# Altium PCB LKS_Motor_0406.PcbDoc (part 2 of 4)
Units mm, origin at the board's own origin, x right, y up, seen from the top; angles counter-clockwise.
Board outline 117 x 10 mm, 2 copper layers (Top Layer, Bottom Layer); 114 components, 77 nets, 340 pads, 169 vias.
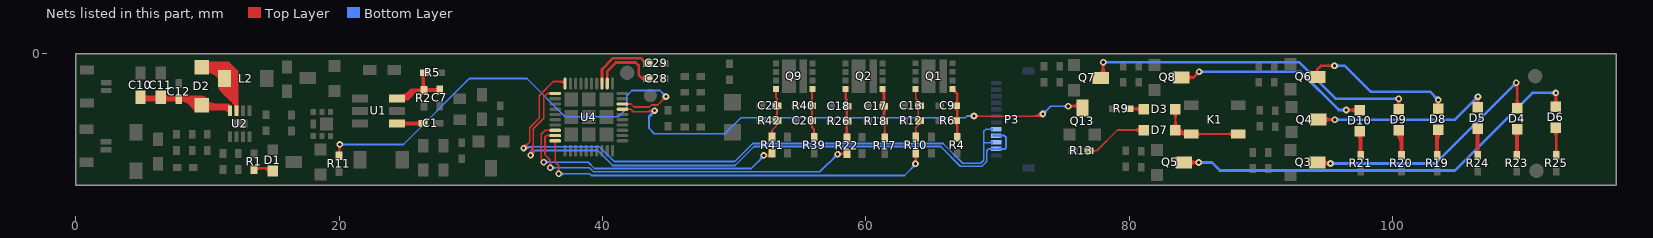
[diagram p2: the nets of this part, all layers, seen from the top]

## Via types
v1: diameter 0.5, hole 0.25, Top Layer to Bottom Layer, 167 vias
v2: diameter 0.7, hole 0.4, Top Layer to Bottom Layer, 2 vias

## Nets (pads, with @x,y where several pads share a name; then routed paths per layer and width w, separated by ;. In a path a pad name is that pad's centre, name@x,y a point inside that pad or via, vN(x,y) a via of type N, cw(c..) or ccw(c..) an arc to the next point about the centre after c; other vN are vias at no path point) (continued)
KEYIN: Q13.3 U4.37 | length 60.5
  Top Layer w0.127: U4.37@41.517,-4.211 42.158,-4.211 42.342,-4.394 43.409,-4.394 ; v1@68.224,-4.75 73.279,-4.75 v1(73.457,-4.572) ; Q13.3@76.454,-4.115 76.327,-3.988 v1(75.387,-3.988) ; 41.983,-4.211 cw(c41.983,-4.074) 41.887,-4.171 ccw(c41.983,-4.074) 41.983,-4.211 ; 41.983,-4.211 ccw(c41.983,-4.347) 41.887,-4.251 cw(c41.983,-4.347) 41.983,-4.211 ; 43.409,-4.394 ccw(c43.409,-3.874) 43.816,-4.197 cw(c43.409,-3.874) 43.409,-4.394 ; 43.409,-4.394 v1@43.856,-4.394 ; 43.409,-4.394 v1@43.856,-4.394 ; v1@43.856,-4.394 43.963,-4.288 v1@43.856,-4.394 ; v1(75.387,-3.988) ccw(c75.387,-2.879) 76.174,-3.66 cw(c75.387,-2.879) v1(75.387,-3.988) ; 75.837,-3.988 cw(c75.837,-3.538) 75.519,-3.856 ccw(c75.837,-3.538) 75.837,-3.988 ; 75.837,-3.988 ccw(c75.837,-4.438) 75.519,-4.12 cw(c75.837,-4.438) 75.837,-3.988 ; 43.672,-4.394 ccw(c43.672,-4.082) 43.916,-4.276 cw(c43.672,-4.082) 43.672,-4.394 ; 43.708,-4.394 cw(c43.708,-4.568) 43.831,-4.445 ccw(c43.708,-4.568) 43.708,-4.394 ; v1@68.356,-4.856 cw(c68.613,-5.113) 68.613,-4.75 ccw(c68.613,-5.113) v1@68.356,-4.856 ; v1@68.356,-4.593 ccw(c68.736,-4.213) 68.736,-4.75 cw(c68.736,-4.213) v1@68.356,-4.593 ; 72.577,-4.75 ccw(c72.577,-3.693) 73.325,-4.44 cw(c72.577,-3.693) 72.577,-4.75 ; 72.884,-4.75 ccw(c72.884,-3.999) 73.415,-4.53 cw(c72.884,-3.999) 72.884,-4.75 ; 73.191,-4.75 ccw(c73.191,-4.306) 73.505,-4.62 cw(c73.191,-4.306) 73.191,-4.75 ; v1@75.626,-3.988 cw(c75.626,-4.765) 76.176,-4.215 ccw(c75.626,-4.765) v1@75.626,-3.988 ; 75.692,-3.988 ccw(c75.692,-3.181) 76.265,-3.749 cw(c75.692,-3.181) 75.692,-3.988 ; 75.933,-3.988 cw(c75.933,-4.458) 76.265,-4.126 ccw(c75.933,-4.458) 75.933,-3.988 ; Q13.3@75.997,-3.988 ccw(c75.997,-3.484) 76.355,-3.839 cw(c75.997,-3.484) Q13.3@75.997,-3.988
  Bottom Layer w0.127: 43.591,-4.796 ccw(c43.144,-4.348) v1@43.776,-4.321 ; 43.601,-4.649 cw(c43.963,-5.011) 43.963,-4.5 ccw(c43.963,-4.681) 43.834,-4.553 ; 43.662,-4.588 ccw(c43.387,-4.313) v1@43.776,-4.313 ; 43.674,-4.713 ccw(c43.356,-4.394) v1@43.806,-4.394 ; 43.796,-4.591 ccw(c43.536,-4.331) v1@43.903,-4.316 ; v1(68.224,-4.724) 67.691,-4.724 67.564,-4.851 50.521,-4.851 49.301,-6.071 43.941,-6.071 43.536,-5.665 43.536,-5.309 ; v1(73.457,-4.572) 74.041,-3.988 v1(75.387,-3.988) ; 43.536,-5.309 43.536,-4.715 43.963,-4.288 43.963,-4.424 43.536,-4.851 43.536,-5.309 ; 67.774,-4.724 cw(c67.774,-5.175) 68.093,-4.856 ccw(c67.774,-5.175) 67.774,-4.724 ; 67.774,-4.724 ccw(c67.774,-4.274) 68.093,-4.593 cw(c67.774,-4.274) 67.774,-4.724 ; 73.775,-4.254 cw(c73.457,-3.935) 73.457,-4.386 ccw(c73.457,-3.935) 73.775,-4.254 ; 73.775,-4.254 ccw(c74.094,-4.572) 73.643,-4.572 cw(c74.094,-4.572) 73.775,-4.254 ; 74.937,-3.988 cw(c74.937,-4.438) 75.255,-4.12 ccw(c74.937,-4.438) 74.937,-3.988 ; 74.937,-3.988 ccw(c74.937,-3.538) 75.255,-3.856 cw(c74.937,-3.538) 74.937,-3.988
  other v1: 43.963,-4.313
KEYOUT: R11.2 U4.38 | length 42.3
  Top Layer w0.127: R11.2@19.99,-7.722 20.041,-7.671 v1(20.041,-6.883) ; U4.38@41.517,-3.811 42.165,-3.811 42.393,-4.039 43.561,-4.039 43.713,-3.886 44.196,-3.886 v1(44.831,-3.251) ; 20.041,-7.334 cw(c20.491,-7.334) 20.172,-7.015 ccw(c20.491,-7.334) 20.041,-7.334 ; 20.041,-7.334 ccw(c19.59,-7.334) 19.909,-7.015 cw(c19.59,-7.334) 20.041,-7.334 ; 20.041,-7.334 ccw(c20.327,-7.334) 20.125,-7.536 cw(c20.327,-7.334) 20.041,-7.334 ; 41.983,-3.811 cw(c41.983,-3.674) 41.887,-3.771 ccw(c41.983,-3.674) 41.983,-3.811 ; 41.983,-3.811 ccw(c41.983,-3.947) 41.887,-3.851 cw(c41.983,-3.947) 41.983,-3.811 ; 44.513,-3.57 cw(c44.831,-3.888) 44.831,-3.438 ccw(c44.831,-3.888) 44.513,-3.57 ; 44.513,-3.57 ccw(c44.194,-3.251) 44.645,-3.251 cw(c44.194,-3.251) 44.513,-3.57 ; R11.2@19.855,-7.536 ccw(c19.407,-7.088) 20.041,-7.088 cw(c19.407,-7.088) R11.2@19.855,-7.536 ; R11.2@19.945,-7.626 ccw(c19.714,-7.395) 20.041,-7.395 cw(c19.714,-7.395) R11.2@19.945,-7.626
  Bottom Layer w0.127: v1(20.041,-6.883) 24.892,-6.883 29.896,-1.88 34.265,-1.88 37.16,-4.775 41.224,-4.775 41.859,-4.14 41.859,-3.175 42.24,-2.794 44.374,-2.794 v1(44.831,-3.251) ; 20.491,-6.883 cw(c20.491,-6.433) 20.172,-6.752 ccw(c20.491,-6.433) 20.491,-6.883 ; 20.491,-6.883 ccw(c20.491,-7.334) 20.172,-7.015 cw(c20.491,-7.334) 20.491,-6.883 ; 44.513,-2.933 cw(c44.194,-3.251) 44.645,-3.251 ccw(c44.194,-3.251) 44.513,-2.933 ; 44.513,-2.933 ccw(c44.831,-2.614) 44.831,-3.065 cw(c44.831,-2.614) 44.513,-2.933
LH_OUT_01: P3.8 P3.10 U4.10 | length 53.6
  Top Layer w0.127: v1(34.011,-7.163) 34.468,-6.706 34.468,-5.613 35.204,-4.877 35.204,-3.175 36.271,-2.108 U4.10@37.167,-2.108 ; 34.329,-6.844 cw(c34.011,-6.526) 34.011,-6.976 ccw(c34.011,-6.526) 34.329,-6.844 ; 34.329,-6.844 ccw(c34.647,-7.163) 34.197,-7.163 cw(c34.647,-7.163) 34.329,-6.844 ; 36.663,-2.108 cw(c36.663,-2.765) 37.127,-2.301 ccw(c36.663,-2.765) 36.663,-2.108 ; 36.969,-2.108 cw(c36.969,-2.458) 37.217,-2.211 ccw(c36.969,-2.458) 36.969,-2.108
  Bottom Layer w0.127: v1(34.011,-7.163) 34.108,-7.065 39.78,-7.065 40.894,-8.179 50.038,-8.179 51.41,-6.807 65.862,-6.807 67.361,-8.306 68.732,-8.306 68.961,-8.077 68.961,-6.756 ; P3.10@69.647,-6.722 69.612,-6.756 68.961,-6.756 ; P3.8@69.647,-5.722 69.132,-5.722 68.961,-5.893 68.961,-6.756 ; 69.414,-5.722 cw(c69.414,-5.967) 69.588,-5.793 ccw(c69.414,-5.967) 69.414,-5.722 ; 69.414,-5.722 ccw(c69.414,-5.476) 69.588,-5.65 cw(c69.414,-5.476) 69.414,-5.722 ; v1@34.053,-7.205 cw(c34.39,-7.542) 34.39,-7.065 ccw(c34.39,-7.542) v1@34.053,-7.205 ; v1@34.142,-7.295 cw(c34.697,-7.849) 34.697,-7.065 ccw(c34.697,-7.849) v1@34.142,-7.295 ; 69.33,-6.756 ccw(c69.33,-6.392) 69.588,-6.65 cw(c69.33,-6.392) 69.33,-6.756
LH_OUT_02: P3.9 P3.11 U4.11 | length 54.4
  Top Layer w0.127: v1(34.544,-7.696) 34.734,-7.506 34.734,-5.702 35.547,-4.889 35.547,-3.264 35.801,-3.011 U4.11@36.417,-3.011 ; 35.951,-3.011 cw(c35.951,-3.147) 36.047,-3.051 ccw(c35.951,-3.147) 35.951,-3.011 ; 35.951,-3.011 ccw(c35.951,-2.874) 36.047,-2.971 cw(c35.951,-2.874) 35.951,-3.011 ; v1@34.412,-7.564 ccw(c33.634,-6.786) 34.734,-6.786 cw(c33.634,-6.786) v1@34.412,-7.564 ; v1@34.502,-7.654 ccw(c33.94,-7.093) 34.734,-7.093 cw(c33.94,-7.093) v1@34.502,-7.654 ; v1@34.592,-7.744 ccw(c34.247,-7.399) 34.734,-7.399 cw(c34.247,-7.399) v1@34.592,-7.744
  Bottom Layer w0.127: v1(34.544,-7.696) 34.9,-7.341 39.649,-7.341 40.792,-8.484 50.063,-8.484 51.511,-7.036 65.684,-7.036 67.183,-8.534 68.834,-8.534 69.19,-8.179 69.19,-7.374 69.342,-7.222 P3.11@69.647,-7.222 ; 34.862,-7.378 cw(c34.544,-7.059) 34.544,-7.51 ccw(c34.544,-7.059) 34.862,-7.378 ; 34.862,-7.378 ccw(c35.181,-7.696) 34.73,-7.696 cw(c35.181,-7.696) 34.862,-7.378 ; 69.414,-7.222 cw(c69.414,-7.467) 69.588,-7.293 ccw(c69.414,-7.467) 69.414,-7.222 ; 69.414,-7.222 ccw(c69.414,-6.976) 69.588,-7.15 cw(c69.414,-6.976) 69.414,-7.222
  Bottom Layer w0.15: P3.11@69.647,-7.222 69.952,-7.222 70.579,-7.222 70.637,-7.163 70.637,-6.325 70.534,-6.222 69.952,-6.222 P3.9@69.647,-6.222 ; 70.36,-7.222 cw(c70.36,-7.004) 70.206,-7.158 ccw(c70.36,-7.004) 70.36,-7.222 ; 70.36,-7.222 ccw(c70.36,-7.439) 70.206,-7.285 cw(c70.36,-7.439) 70.36,-7.222 ; 70.36,-6.222 cw(c70.36,-6.004) 70.206,-6.158 ccw(c70.36,-6.004) 70.36,-6.222 ; 70.36,-6.222 ccw(c70.36,-6.439) 70.206,-6.285 cw(c70.36,-6.439) 70.36,-6.222
LO1: R41.2 U4.18 | length 27.6
  Top Layer w0.127: v1(35.535,-8.23) 35.357,-8.052 35.357,-6.121 35.668,-5.811 U4.18@36.417,-5.811 ; v1(52.248,-7.722) 52.248,-7.747 v1@52.273,-7.772 ; R41.2@52.883,-7.544 R41.2@52.654,-7.772 ; 35.951,-5.811 cw(c35.951,-5.947) 36.047,-5.851 ccw(c35.951,-5.947) 35.951,-5.811 ; 35.951,-5.811 ccw(c35.951,-5.674) 36.047,-5.771 cw(c35.951,-5.674) 35.951,-5.811 ; v1@52.273,-7.772 ccw(c52.273,-7.25) 52.72,-7.521 cw(c52.273,-7.25) v1@52.273,-7.772 ; v1@52.273,-7.772 R41.2@52.654,-7.772 ; R41.2@52.654,-7.772 cw(c52.654,-7.492) 52.41,-7.63 ccw(c52.654,-7.492) R41.2@52.654,-7.772 ; v1@52.38,-7.853 cw(c52.575,-8.049) 52.575,-7.772 ccw(c52.575,-8.049) v1@52.38,-7.853 ; 52.499,-7.772 ccw(c52.499,-7.387) 52.829,-7.587 cw(c52.499,-7.387) 52.499,-7.772
  Bottom Layer w0.127: v1(35.535,-8.23) 38.913,-8.23 39.395,-8.712 51.308,-8.712 52.248,-7.772 v1(52.248,-7.722) ; 35.985,-8.23 cw(c35.985,-7.779) 35.666,-8.098 ccw(c35.985,-7.779) 35.985,-8.23 ; 35.985,-8.23 ccw(c35.985,-8.68) 35.666,-8.361 cw(c35.985,-8.68) 35.985,-8.23 ; 51.894,-8.127 ccw(c51.488,-7.722) 52.061,-7.722 cw(c51.488,-7.722) 51.894,-8.127 ; 52.016,-8.004 cw(c52.248,-8.236) 52.248,-7.908 ccw(c52.248,-8.236) 52.016,-8.004
LO2: R22.2 U4.19 | length 34.2
  Top Layer w0.127: v1(36.043,-8.661) 36.043,-8.077 35.636,-7.671 35.636,-6.325 35.75,-6.211 U4.19@36.417,-6.211 ; v1(57.861,-7.62) 57.896,-7.585 R22.2@58.571,-7.585 ; 35.951,-6.211 cw(c35.951,-6.347) 36.047,-6.251 ccw(c35.951,-6.347) 35.951,-6.211 ; 35.951,-6.211 ccw(c35.951,-6.074) 36.047,-6.171 cw(c35.951,-6.074) 35.951,-6.211 ; 36.043,-8.211 cw(c35.592,-8.211) 35.911,-8.53 ccw(c35.592,-8.211) 36.043,-8.211 ; 36.043,-8.211 ccw(c36.493,-8.211) 36.174,-8.53 cw(c36.493,-8.211) 36.043,-8.211 ; 58.111,-7.585 cw(c58.111,-8.045) 58.436,-7.719 ccw(c58.111,-8.045) 58.111,-7.585 ; 58.111,-7.585 ccw(c58.111,-7.125) 58.436,-7.45 cw(c58.111,-7.125) 58.111,-7.585 ; v1@57.993,-7.752 cw(c58.397,-8.155) 58.397,-7.585 ccw(c58.397,-8.155) v1@57.993,-7.752 ; v1@57.993,-7.488 ccw(c58.226,-7.255) 58.226,-7.585 cw(c58.226,-7.255) v1@57.993,-7.488
  Bottom Layer w0.127: v1@36.043,-8.738 v1(36.043,-8.661) 39.014,-8.661 39.319,-8.966 56.515,-8.966 v1(57.861,-7.62) ; 36.493,-8.661 cw(c36.493,-8.211) 36.174,-8.53 ccw(c36.493,-8.211) 36.493,-8.661 ; 36.493,-8.661 ccw(c36.493,-9.112) 36.174,-8.793 cw(c36.493,-9.112) 36.493,-8.661 ; 57.543,-7.938 cw(c57.861,-8.257) 57.861,-7.806 ccw(c57.861,-8.257) 57.543,-7.938 ; 57.543,-7.938 ccw(c57.224,-7.62) 57.675,-7.62 cw(c57.224,-7.62) 57.543,-7.938
LO3: R10.2 U4.20 | length 38.5
  Top Layer w0.127: U4.20@36.417,-6.611 36.417,-8.248 36.678,-8.509 v1@36.678,-9.068 ; v1(63.779,-8.357) 63.805,-8.331 R10.2@63.805,-7.544 ; 36.417,-6.747 cw(c36.553,-6.747) 36.457,-6.651 ccw(c36.553,-6.747) 36.417,-6.747 ; 36.417,-6.747 ccw(c36.281,-6.747) 36.377,-6.651 cw(c36.281,-6.747) 36.417,-6.747 ; 36.678,-8.668 cw(c36.227,-8.668) 36.546,-8.987 ccw(c36.227,-8.668) 36.678,-8.668 ; 36.678,-8.668 ccw(c37.128,-8.668) 36.809,-8.987 cw(c37.128,-8.668) 36.678,-8.668 ; 63.805,-8.08 cw(c64.265,-8.08) 63.94,-7.755 ccw(c64.265,-8.08) 63.805,-8.08 ; 63.805,-8.08 ccw(c63.345,-8.08) 63.67,-7.755 cw(c63.345,-8.08) 63.805,-8.08 ; v1@63.648,-8.225 ccw(c63.268,-7.845) 63.805,-7.845 cw(c63.268,-7.845) v1@63.648,-8.225 ; 63.805,-7.968 ccw(c64.168,-7.968) 63.911,-8.225 cw(c64.168,-7.968) 63.805,-7.968
  Bottom Layer w0.127: v1(36.678,-9.119) 39.014,-9.119 39.141,-9.246 62.941,-9.246 63.779,-8.407 v1(63.779,-8.357) ; 37.128,-9.119 cw(c37.128,-8.668) 36.809,-8.987 ccw(c37.128,-8.668) 37.128,-9.119 ; 37.128,-9.119 ccw(c37.128,-9.569) 36.809,-9.25 cw(c37.128,-9.569) 37.128,-9.119 ; 63.425,-8.762 ccw(c63.02,-8.357) 63.593,-8.357 cw(c63.02,-8.357) 63.425,-8.762 ; 63.548,-8.639 cw(c63.779,-8.871) 63.779,-8.543 ccw(c63.779,-8.871) 63.548,-8.639
NetC1_2: C1.2 U1.1 | length 3.7
  Top Layer w0.3: U1.1@24.311,-5.293 U1.1@24.387,-5.293 C1.2@26.38,-5.293 ; 25.049,-5.293 cw(c25.049,-4.931) 24.793,-5.187 ccw(c25.049,-4.931) 25.049,-5.293 ; 25.049,-5.293 ccw(c25.049,-5.656) 24.793,-5.399 cw(c25.049,-5.656) 25.049,-5.293 ; 26.013,-5.293 ccw(c26.013,-5.007) 26.215,-5.21 cw(c26.013,-5.007) 26.013,-5.293
NetC7_1: C7.1 R2.2 R5.1 U1.3 | length 11.8
  Top Layer w0.3: U1.3@24.311,-3.393 U1.3@24.877,-3.393 ; 25.298,-2.972 25.502,-2.769 ; 25.908,-2.769 25.811,-2.769 25.187,-3.393 U1.3@24.387,-3.393 U1.3@24.877,-3.393 ; R2.2@26.289,-2.769 R2.2@26.441,-2.769 ; R5.1@26.391,-1.448 26.391,-2.718 R2.2@26.441,-2.769 ; C7.1@27.635,-2.743 26.467,-2.743 R2.2@26.441,-2.769 ; U1.3@24.877,-3.393 25.502,-2.769 ; 25.049,-3.393 cw(c25.049,-3.031) 24.793,-3.287 ccw(c25.049,-3.031) 25.049,-3.393 ; 25.049,-3.393 ccw(c25.049,-3.756) 24.793,-3.499 cw(c25.049,-3.756) 25.049,-3.393 ; 25.502,-2.769 R2.2@26.441,-2.769 ; U1.3@24.687,-3.243 ccw(c24.687,-2.423) 25.267,-3.003 cw(c24.687,-2.423) U1.3@24.687,-3.243 ; 26.391,-2.319 ccw(c26.815,-2.319) 26.515,-2.619 cw(c26.815,-2.319) 26.391,-2.319 ; 26.391,-1.76 cw(c26.728,-1.76) 26.49,-1.521 ccw(c26.728,-1.76) 26.391,-1.76 ; R2.2@26.515,-2.842 cw(c26.754,-3.081) 26.754,-2.743 ccw(c26.754,-3.081) R2.2@26.515,-2.842
NetC9_2: C9.2 Q1.1 R4.1 R6.1 | length 10.6
  Top Layer w0.2: Q1.1@66.577,-2.672 66.953,-3.048 R4.1@66.953,-6.331 ; R4.1@66.877,-6.356 R4.1@66.877,-6.331 ; 66.953,-5.883 cw(c66.581,-5.883) 66.844,-6.146 ccw(c66.581,-5.883) 66.953,-5.883 ; 66.953,-5.883 ccw(c67.325,-5.883) 67.062,-6.146 cw(c67.325,-5.883) 66.953,-5.883 ; Q1.1@66.589,-2.788 cw(c66.589,-3.037) 66.765,-2.861 ccw(c66.589,-3.037) Q1.1@66.589,-2.788 ; Q1.1@66.705,-2.672 ccw(c67.016,-2.672) 66.796,-2.891 cw(c67.016,-2.672) Q1.1@66.705,-2.672 ; R6.1@66.798,-5.195 cw(c66.424,-5.569) 66.953,-5.569 ccw(c66.424,-5.569) R6.1@66.798,-5.195 ; R6.1@66.798,-4.977 ccw(c66.424,-4.603) 66.953,-4.603 cw(c66.424,-4.603) R6.1@66.798,-4.977 ; C9.2@66.798,-4.052 cw(c66.424,-4.426) 66.953,-4.426 ccw(c66.424,-4.426) C9.2@66.798,-4.052 ; C9.2@66.798,-3.834 ccw(c66.424,-3.46) 66.953,-3.46 cw(c66.424,-3.46) C9.2@66.798,-3.834 ; 66.953,-5.347 cw(c67.168,-5.347) 67.016,-5.195 ccw(c67.168,-5.347) 66.953,-5.347 ; 66.953,-4.826 ccw(c67.168,-4.826) 67.016,-4.977 cw(c67.168,-4.826) 66.953,-4.826 ; 66.953,-4.204 cw(c67.168,-4.204) 67.016,-4.052 ccw(c67.168,-4.204) 66.953,-4.204 ; 66.953,-3.683 ccw(c67.168,-3.683) 67.016,-3.834 cw(c67.168,-3.683) 66.953,-3.683
NetC10_2: C10.2 C11.2 C12.2 D2.2 U2.4 | length 48
  Top Layer w0.3: C10.2@5.243,-3.478 5.245,-3.48 8.407,-3.48 9.07,-4.142 U2.4@11.682,-4.142 ; C10.2@5.258,-3.315 6.833,-3.315 9.383,-3.315 9.976,-3.908 11.448,-3.908 ; 7.172,-3.315 cw(c7.172,-6.306) D2.2@9.287,-4.191 ; 7.223,-3.315 cw(c7.223,-6.306) D2.2@9.338,-4.191 ; C12.2@7.896,-3.315 cw(c7.896,-5.581) D2.2@9.499,-3.979 ; C12.2@7.947,-3.315 cw(c7.947,-5.581) D2.2@9.55,-3.979 ; 8.621,-3.315 cw(c8.621,-4.857) D2.2@9.711,-3.766 ; 8.671,-3.315 cw(c8.671,-4.857) D2.2@9.762,-3.766 ; 9.345,-3.315 cw(c9.345,-4.133) D2.2@9.923,-3.554 ; 9.396,-3.315 cw(c9.396,-4.133) D2.2@9.974,-3.554 ; D2.2@9.439,-3.37 cw(c9.168,-3.641) D2.2@9.487,-3.852 ; D2.2@9.64,-3.837 ccw(c10.377,-3.101) 10.377,-4.142 ; D2.2@9.691,-3.837 ccw(c10.428,-3.101) 10.428,-4.142 ; D2.2@9.853,-4.191 cw(c10.535,-4.874) 10.535,-3.908 cw(c10.535,-2.942) 9.853,-3.625 ccw(c11.101,-2.376) 11.101,-4.142 ; D2.2@9.903,-4.191 cw(c10.586,-4.874) 10.586,-3.908 cw(c10.586,-2.942) 9.903,-3.625 ccw(c11.152,-2.376) 11.152,-4.142 ; 11.168,-3.908 11.403,-4.142 U2.4@11.696,-4.436 ; 5.46,-3.315 cw(c5.46,-2.757) 5.066,-3.151 ccw(c5.46,-2.757) 5.46,-3.315 ; 5.46,-3.315 ccw(c5.46,-3.872) 5.066,-3.478 cw(c5.46,-3.872) 5.46,-3.315 ; 5.894,-3.315 cw(c5.894,-3.872) 6.288,-3.478 ccw(c5.894,-3.872) 5.894,-3.315 ; 5.894,-3.315 ccw(c5.894,-2.757) 6.288,-3.151 cw(c5.894,-2.757) 5.894,-3.315 ; 7.009,-3.315 cw(c7.009,-2.757) 6.615,-3.151 ccw(c7.009,-2.757) 7.009,-3.315 ; 7.009,-3.315 ccw(c7.009,-3.872) 6.615,-3.478 cw(c7.009,-3.872) 7.009,-3.315 ; 11.448,-3.908 cw(c11.448,-4.188) U2.4@11.696,-4.059 ; 11.448,-3.908 cw(c11.448,-4.188) U2.4@11.696,-4.059 ; U2.4@11.696,-4.059 cw(c11.494,-3.857) 11.494,-4.142 ccw(c11.494,-3.857) U2.4@11.696,-4.059 ; U2.4@11.696,-4.059 ccw(c11.332,-4.422) 11.332,-3.908 cw(c11.332,-4.422) U2.4@11.696,-4.059 ; C10.2@5.066,-3.605 cw(c5.368,-3.907) 5.368,-3.48 ccw(c5.368,-3.907) C10.2@5.066,-3.605 ; C10.2@5.066,-3.278 ccw(c5.552,-2.792) 5.552,-3.48 cw(c5.552,-2.792) C10.2@5.066,-3.278 ; 5.802,-3.48 ccw(c5.802,-2.792) 6.288,-3.278 cw(c5.802,-2.792) 5.802,-3.48 ; 5.986,-3.48 cw(c5.986,-3.907) 6.288,-3.605 ccw(c5.986,-3.907) 5.986,-3.48 ; C11.2@6.615,-3.605 cw(c6.917,-3.907) 6.917,-3.48 ccw(c6.917,-3.907) C11.2@6.615,-3.605 ; C11.2@6.615,-3.278 ccw(c7.101,-2.792) 7.101,-3.48 cw(c7.101,-2.792) C11.2@6.615,-3.278 ; 7.357,-3.315 cw(c7.357,-3.869) 7.75,-3.477 ccw(c7.357,-3.869) 7.357,-3.315 ; C12.2@7.897,-3.477 cw(c8.289,-3.869) 8.289,-3.315 ccw(c8.289,-3.869) C12.2@7.897,-3.477
NetC13_2: C13.2 Q1.8 R10.1 R12.1 | length 11
  Top Layer w0.127: Q1.8@63.793,-2.672 63.793,-3.417 63.983,-3.607 ; R10.1@63.805,-6.325 63.805,-5.613 63.983,-5.436 ; 63.793,-3.04 cw(c64.161,-3.04) 63.901,-2.779 ccw(c64.161,-3.04) 63.793,-3.04 ; 63.793,-3.04 ccw(c63.425,-3.04) 63.685,-2.779 cw(c63.425,-3.04) 63.793,-3.04 ; 63.805,-5.788 cw(c63.345,-5.788) 63.67,-6.114 ccw(c63.345,-5.788) 63.805,-5.788 ; 63.805,-5.788 ccw(c64.265,-5.788) 63.94,-6.114 cw(c64.265,-5.788) 63.805,-5.788 ; 63.983,-5.437 cw(c64.184,-5.437) 64.094,-5.256 ccw(c64.184,-5.437) 63.983,-5.437 ; 63.983,-5.437 ccw(c63.719,-5.437) 63.887,-5.233 cw(c63.719,-5.437) 63.983,-5.437 ; 63.983,-5.436 63.983,-3.607 ; 63.983,-3.607 cw(c63.748,-3.607) 63.891,-3.793 ccw(c63.748,-3.607) 63.983,-3.607 ; 63.983,-3.607 ccw(c64.162,-3.607) 64.087,-3.77 cw(c64.162,-3.607) 63.983,-3.607 ; R12.1@63.873,-4.952 ccw(c63.609,-4.688) 63.983,-4.688 cw(c63.609,-4.688) R12.1@63.873,-4.952 ; C13.2@63.873,-4.078 cw(c63.609,-4.342) 63.983,-4.342 ccw(c63.609,-4.342) C13.2@63.873,-4.078 ; 63.983,-4.565 ccw(c64.529,-4.565) 64.143,-4.952 cw(c64.529,-4.565) 63.983,-4.565 ; 63.983,-4.464 cw(c64.529,-4.464) 64.143,-4.078 ccw(c64.529,-4.464) 63.983,-4.464
NetC17_2: C17.2 Q2.1 R17.1 R18.1 | length 19.6
  Top Layer w0.15: R17.1@61.443,-6.416 Q2.1@61.443,-2.86 ; 61.443,-5.857 cw(c61.01,-5.857) 61.316,-6.163 ccw(c61.01,-5.857) 61.443,-5.857 ; 61.443,-5.857 ccw(c61.875,-5.857) 61.569,-6.163 cw(c61.875,-5.857) 61.443,-5.857 ; Q2.1@61.176,-2.781 cw(c60.533,-3.424) 61.443,-3.424 ccw(c60.533,-3.424) Q2.1@61.176,-2.781 ; Q2.1@61.282,-2.675 cw(c60.895,-3.061) 61.443,-3.061 ccw(c60.895,-3.061) Q2.1@61.282,-2.675 ; R18.1@61.314,-5.248 cw(c61.005,-5.557) 61.443,-5.557 ccw(c61.005,-5.557) R18.1@61.314,-5.248 ; R18.1@61.314,-4.994 ccw(c61.005,-4.685) 61.443,-4.685 cw(c61.005,-4.685) R18.1@61.314,-4.994 ; C17.2@61.314,-4.105 cw(c61.005,-4.414) 61.443,-4.414 ccw(c61.005,-4.414) C17.2@61.314,-4.105 ; C17.2@61.314,-3.851 ccw(c61.005,-3.542) 61.443,-3.542 cw(c61.005,-3.542) C17.2@61.314,-3.851 ; 61.443,-5.549 cw(c61.869,-5.549) 61.568,-5.248 ccw(c61.869,-5.549) 61.443,-5.549 ; 61.443,-4.693 ccw(c61.869,-4.693) 61.568,-4.994 cw(c61.869,-4.693) 61.443,-4.693 ; 61.443,-4.406 cw(c61.869,-4.406) 61.568,-4.105 ccw(c61.869,-4.406) 61.443,-4.406 ; 61.443,-3.55 ccw(c61.869,-3.55) 61.568,-3.851 cw(c61.869,-3.55) 61.443,-3.55
  Top Layer w0.2: Q2.1@61.263,-2.681 61.365,-2.783 R18.1@61.365,-5.146 ; 61.365,-4.749 cw(c60.993,-4.749) 61.256,-5.012 ccw(c60.993,-4.749) 61.365,-4.749 ; 61.365,-4.749 ccw(c61.737,-4.749) 61.474,-5.012 cw(c61.737,-4.749) 61.365,-4.749 ; 61.365,-4.35 cw(c61.737,-4.35) 61.474,-4.087 ccw(c61.737,-4.35) 61.365,-4.35 ; 61.365,-4.35 ccw(c60.993,-4.35) 61.256,-4.087 cw(c60.993,-4.35) 61.365,-4.35 ; 61.365,-3.606 cw(c60.993,-3.606) 61.256,-3.869 ccw(c60.993,-3.606) 61.365,-3.606 ; 61.365,-3.606 ccw(c61.737,-3.606) 61.474,-3.869 cw(c61.737,-3.606) 61.365,-3.606 ; Q2.1@61.194,-2.763 cw(c60.781,-3.175) 61.365,-3.175 ccw(c60.781,-3.175) Q2.1@61.194,-2.763
NetC18_2: C18.2 Q2.8 R22.1 R26.1 | length 10.5
  Top Layer w0.2: Q2.8@58.48,-2.681 58.48,-3.413 58.571,-3.504 C18.2@58.571,-3.978 R22.1@58.571,-6.416 ; 58.48,-2.961 cw(c58.76,-2.961) 58.562,-2.763 ccw(c58.76,-2.961) 58.48,-2.961 ; 58.48,-2.961 ccw(c58.2,-2.961) 58.398,-2.763 cw(c58.2,-2.961) 58.48,-2.961 ; 58.571,-5.918 cw(c58.199,-5.918) 58.462,-6.18 ccw(c58.199,-5.918) 58.571,-5.918 ; 58.571,-5.918 ccw(c58.943,-5.918) 58.68,-6.18 cw(c58.943,-5.918) 58.571,-5.918 ; 58.571,-5.493 cw(c58.943,-5.493) 58.68,-5.23 ccw(c58.943,-5.493) 58.571,-5.493 ; 58.571,-5.493 ccw(c58.199,-5.493) 58.462,-5.23 cw(c58.199,-5.493) 58.571,-5.493 ; 58.571,-4.749 cw(c58.199,-4.749) 58.462,-5.012 ccw(c58.199,-4.749) 58.571,-4.749 ; 58.571,-4.749 ccw(c58.943,-4.749) 58.68,-5.012 cw(c58.943,-4.749) 58.571,-4.749 ; 58.571,-4.35 cw(c58.943,-4.35) 58.68,-4.087 ccw(c58.943,-4.35) 58.571,-4.35 ; 58.571,-4.35 ccw(c58.199,-4.35) 58.462,-4.087 cw(c58.199,-4.35) 58.571,-4.35 ; 58.571,-3.606 cw(c58.199,-3.606) 58.462,-3.869 ccw(c58.199,-3.606) 58.571,-3.606 ; 58.571,-3.606 ccw(c58.943,-3.606) 58.68,-3.869 cw(c58.943,-3.606) 58.571,-3.606
NetC20_2: C20.2 Q9.1 R39.1 R40.1 | length 11.7
  Top Layer w0.15: Q9.1@55.955,-2.681 55.904,-2.732 55.904,-5.146 55.904,-5.561 56.056,-5.713 R39.1@56.056,-6.442 ; 55.904,-5.528 cw(c56.336,-5.528) 56.03,-5.222 ccw(c56.336,-5.528) 55.904,-5.528 ; 55.904,-5.528 ccw(c55.472,-5.528) 55.777,-5.222 cw(c55.472,-5.528) 55.904,-5.528 ; 55.904,-4.663 cw(c55.472,-4.663) 55.777,-4.969 ccw(c55.472,-4.663) 55.904,-4.663 ; 55.904,-4.663 ccw(c56.336,-4.663) 56.03,-4.969 cw(c56.336,-4.663) 55.904,-4.663 ; 55.904,-4.385 cw(c56.336,-4.385) 56.03,-4.079 ccw(c56.336,-4.385) 55.904,-4.385 ; 55.904,-4.385 ccw(c55.472,-4.385) 55.777,-4.079 cw(c55.472,-4.385) 55.904,-4.385 ; 55.904,-3.52 cw(c55.472,-3.52) 55.777,-3.826 ccw(c55.472,-3.52) 55.904,-3.52 ; 55.904,-3.52 ccw(c56.336,-3.52) 56.03,-3.826 cw(c56.336,-3.52) 55.904,-3.52 ; Q9.1@55.842,-2.781 cw(c55.694,-2.929) 55.904,-2.929 ccw(c55.694,-2.929) Q9.1@55.842,-2.781 ; 55.904,-3.113 cw(c56.374,-3.113) 56.042,-2.781 ccw(c56.374,-3.113) 55.904,-3.113 ; R39.1@55.955,-6.137 ccw(c55.711,-5.893) 56.056,-5.893 cw(c55.711,-5.893) R39.1@55.955,-6.137 ; 56.056,-5.77 ccw(c56.575,-5.77) 56.208,-6.137 cw(c56.575,-5.77) 56.056,-5.77
NetC21_2: C21.2 Q9.8 R41.1 R42.1 | length 11.1
  Top Layer w0.127: R41.1@52.883,-6.325 52.883,-5.815 ; R42.1@53.262,-5.004 53.262,-5.436 ; 52.883,-5.815 cw(c52.485,-5.815) 52.754,-6.108 ccw(c52.485,-5.815) 52.883,-5.815 ; 52.883,-5.815 ccw(c53.281,-5.815) 53.012,-6.108 cw(c53.281,-5.815) 52.883,-5.815 ; 52.883,-5.815 53.262,-5.436 ; 53.262,-5.436 cw(c53.47,-5.436) 53.362,-5.258 ccw(c53.47,-5.436) 53.262,-5.436 ; 53.262,-5.436 ccw(c53.054,-5.436) 53.163,-5.258 cw(c53.054,-5.436) 53.262,-5.436
  Top Layer w0.15: Q9.8@53.171,-2.681 53.171,-3.311 53.262,-3.402 53.262,-3.978 R42.1@53.262,-5.004 ; 53.171,-3.021 cw(c53.511,-3.021) 53.271,-2.781 ccw(c53.511,-3.021) 53.171,-3.021 ; 53.171,-3.021 ccw(c52.831,-3.021) 53.072,-2.781 cw(c52.831,-3.021) 53.171,-3.021 ; 53.262,-4.663 cw(c52.83,-4.663) 53.136,-4.969 ccw(c52.83,-4.663) 53.262,-4.663 ; 53.262,-4.663 ccw(c53.694,-4.663) 53.389,-4.969 cw(c53.694,-4.663) 53.262,-4.663 ; 53.262,-4.385 cw(c53.694,-4.385) 53.389,-4.079 ccw(c53.694,-4.385) 53.262,-4.385 ; 53.262,-4.385 ccw(c52.83,-4.385) 53.136,-4.079 cw(c52.83,-4.385) 53.262,-4.385 ; 53.262,-3.52 cw(c52.83,-3.52) 53.136,-3.826 ccw(c52.83,-3.52) 53.262,-3.52 ; 53.262,-3.52 ccw(c53.694,-3.52) 53.389,-3.826 cw(c53.694,-3.52) 53.262,-3.52
NetC28_1: C28.1 U4.2 | length 6.3
  Top Layer w0.2: U4.2@40.367,-2.261 40.367,-1.314 41.021,-0.66 42.52,-0.66 42.748,-0.889 42.748,-1.6 43.028,-1.88 ; C28.1@43.459,-1.88 43.028,-1.88 ; 43.028,-1.88 cw(c43.028,-2.213) 43.271,-1.985 ccw(c43.028,-2.213) 43.028,-1.88 ; 43.028,-1.88 ccw(c43.028,-1.546) 43.271,-1.774 cw(c43.028,-1.546) 43.028,-1.88
NetC29_2: C29.2 U4.3 | length 6.2
  Top Layer w0.2: U4.3@39.967,-2.261 39.967,-1.181 40.818,-0.33 42.926,-0.33 C29.2@43.383,-0.787 ; 43.034,-0.438 ccw(c43.383,-0.088) 43.383,-0.583 cw(c43.383,-0.088) 43.034,-0.438 ; C29.2@43.156,-0.56 cw(c42.98,-0.737) 43.229,-0.737 ccw(c42.98,-0.737) C29.2@43.156,-0.56
NetD1_2: D1.2 R1.2 | length 2.6
  Top Layer w0.2: R1.2@13.538,-8.814 13.665,-8.687 14.393,-8.687 D1.2@14.735,-9.029 ; R1.2@13.647,-8.846 cw(c14.033,-9.232) 14.033,-8.687 ccw(c14.033,-9.232) R1.2@13.647,-8.846 ; R1.2@13.647,-8.629 ccw(c13.787,-8.488) 13.787,-8.687 cw(c13.787,-8.488) R1.2@13.647,-8.629
NetD2_1: D2.1 L2.1 U2.3 | length 87.9
  Top Layer w0.254: D2.1@9.869,-1.306 cw(c10.591,-2.028) 10.591,-1.007 cw(c10.591,0.014) D2.1@9.869,-0.708 ; D2.1@9.92,-1.306 cw(c10.642,-2.028) 10.642,-1.007 cw(c10.642,0.014) D2.1@9.92,-0.708 ; D2.1@9.976,-1.007 10.736,-1.007 L2.1@11.76,-2.032 ; L2.1@10.921,-1.472 10.977,-1.528 10.977,-2.642 11.584,-3.249 ; L2.1@11.481,-2.032 11.481,-3.146 11.584,-3.249 ; 11.76,-3.425 11.584,-3.249 ; 10.658,-0.93 cw(c9.987,-1.601) 10.932,-1.693 ccw(c9.987,-1.601) 10.658,-0.93 ; 10.931,-1.202 ccw(c11.303,-0.83) 11.303,-1.357 cw(c11.303,-0.83) 10.931,-1.202 ; L2.1@11.073,-2.323 cw(c10.419,-3.16) 11.481,-3.16 ccw(c10.419,-3.16) L2.1@11.073,-2.323 ; L2.1@11.23,-2.123 cw(c10.827,-2.639) 11.481,-2.639 ccw(c10.827,-2.639) L2.1@11.23,-2.123 ; L2.1@11.481,-2.501 cw(c11.774,-2.501) 11.567,-2.293 ccw(c11.774,-2.501) L2.1@11.481,-2.501
  Top Layer w0.3: D2.1@9.621,-1.007 9.891,-0.737 11.557,-0.737 12.196,-1.376 12.196,-2.057 ; D2.1@9.622,-1.093 cw(c9.834,-1.44) 10.121,-1.152 ; D2.1@9.64,-1.078 cw(c10.464,-1.902) 10.464,-0.737 ; D2.1@9.64,-0.936 ccw(c10.323,-0.254) 10.323,-1.219 ; D2.1@9.655,-1.101 cw(c9.83,-1.575) 10.187,-1.218 ; D2.1@9.658,-0.96 ccw(c10.232,-0.657) 10.232,-1.306 ; D2.1@9.691,-1.078 cw(c10.515,-1.902) 10.515,-0.737 ; D2.1@9.691,-0.936 ccw(c10.374,-0.254) 10.374,-1.219 ; D2.1@9.923,-0.82 ccw(c10.73,-0.394) 10.73,-1.306 ; D2.1@9.97,-1.003 ccw(c10.188,-1.001) 10.188,-1.219 ; 10.247,-0.737 D2.1@9.976,-1.007 ; 10.456,-1.306 cw(c10.456,-2.25) L2.1@11.261,-1.756 ; 10.495,-0.991 cw(c10.495,-0.082) 9.853,-0.724 ccw(c11.047,0.47) 11.047,-1.219 ; 10.546,-0.991 cw(c10.546,-0.082) 9.903,-0.724 ccw(c11.098,0.47) 11.098,-1.219 ; 10.576,-0.991 ccw(c10.576,-2.013) 9.853,-1.29 cw(c11.189,-2.626) 11.189,-0.737 ; 10.626,-0.991 ccw(c10.626,-2.013) 9.903,-1.29 cw(c11.24,-2.626) 11.24,-0.737 ; 10.748,-1.372 cw(c10.748,-1.903) L2.1@11.255,-1.744 ; L2.1@10.805,-1.381 ccw(c10.996,-1.19) L2.1@11.13,-1.425 ; L2.1@10.812,-1.388 cw(c10.47,-1.73) L2.1@10.953,-1.73 ; L2.1@11.005,-1.913 ccw(c9.92,-2.58) 9.92,-1.306 10.73,-1.306 ; L2.1@11.303,-1.88 10.73,-1.306 ; 11.455,-0.991 11.684,-1.219 ; 11.735,-0.991 9.993,-0.991 D2.1@9.976,-1.007 ; 11.963,-1.219 10.188,-1.219 ; D2.1@9.976,-1.007 10.188,-1.219 ; 10.188,-1.219 cw(c10.188,-2.022) 10.965,-1.818 ccw(c10.188,-2.022) 10.188,-1.219 ; 10.541,-1.372 cw(c10.541,-1.786) 10.954,-1.755 ccw(c10.541,-1.786) 10.541,-1.372 ; 10.541,-1.372 11.201,-2.032 L2.1@11.481,-2.032 ; 10.541,-1.372 11.836,-1.372 ; L2.1@11.481,-2.032 11.227,-2.286 11.227,-2.892 11.889,-3.554 ; L2.1@11.481,-2.032 11.887,-2.032 ; L2.1@11.481,-2.032 L2.1@11.76,-2.311 ; L2.1@11.481,-2.032 12.018,-2.569 12.018,-3.683 ; L2.1@11.481,-2.032 12.196,-2.747 12.196,-4.436 U2.3@12.196,-4.013 ; L2.1@11.653,-2.03 ccw(c12.075,-2.03) L2.1@11.777,-2.328 ; L2.1@11.653,-2.03 ccw(c12.075,-2.03) L2.1@11.777,-2.328 ; L2.1@11.653,-2.03 ccw(c12.075,-2.03) L2.1@11.777,-2.328 ; L2.1@11.653,-2.03 ccw(c12.075,-2.03) L2.1@11.777,-2.328 ; 11.684,-1.219 11.684,-2.235 L2.1@11.76,-2.311 ; 11.684,-1.219 11.836,-1.372 ; L2.1@11.76,-2.311 11.76,-2.921 11.76,-3.425 11.889,-3.554 ; 11.836,-1.372 11.989,-1.524 ; 11.887,-2.032 cw(c11.887,-1.722) 11.613,-1.866 ccw(c11.887,-1.722) 11.887,-2.032 ; 11.887,-2.032 ccw(c11.887,-2.346) 11.611,-2.196 cw(c11.887,-2.346) 11.887,-2.032 ; 11.887,-2.032 12.196,-2.341 ; 11.889,-3.554 12.018,-3.683 ; 11.989,-1.524 11.989,-2.134 12.196,-2.341 ; 11.989,-1.524 12.196,-1.731 12.196,-2.057 ; 12.018,-3.683 12.196,-3.861 U2.3@12.196,-4.013 ; U2.3@12.196,-4.013 12.196,-2.341 ; 12.196,-2.341 12.196,-2.057 ; 10.577,-1.219 cw(c10.577,-1.92) 11.255,-1.742 ccw(c10.577,-1.92) 10.577,-1.219 ; L2.1@10.864,-1.372 cw(c10.864,-1.762) 11.253,-1.733 ccw(c10.864,-1.762) L2.1@10.864,-1.372 ; 10.966,-1.219 cw(c10.966,-1.818) 11.545,-1.666 ccw(c10.966,-1.818) 10.966,-1.219 ; L2.1@11.056,-2.277 cw(c10.643,-2.69) 11.227,-2.69 ccw(c10.643,-2.69) L2.1@11.056,-2.277 ; 11.227,-2.895 cw(c11.968,-2.895) 11.516,-2.307 ccw(c11.968,-2.895) 11.227,-2.895 ; L2.1@11.229,-2.372 cw(c11.085,-3.031) 11.76,-3.031 ccw(c11.085,-3.031) L2.1@11.229,-2.372 ; L2.1@11.293,-2.078 cw(c11.166,-2.659) 11.76,-2.659 ccw(c11.166,-2.659) L2.1@11.293,-2.078 ; L2.1@11.303,-2.38 cw(c11.303,-3.648) 12.2,-2.751 ccw(c11.303,-3.648) L2.1@11.303,-2.38 ; L2.1@11.318,-2.077 cw(c11.559,-2.856) 12.135,-2.28 ccw(c11.559,-2.856) L2.1@11.318,-2.077 ; L2.1@11.335,-2.378 cw(c11.423,-3.339) 12.106,-2.657 ccw(c11.423,-3.339) L2.1@11.335,-2.378 ; L2.1@11.336,-2.068 cw(c11.628,-2.412) 11.948,-2.093 ccw(c11.628,-2.412) L2.1@11.336,-2.068 ; L2.1@11.356,-1.785 cw(c11.247,-2.287) 11.76,-2.287 ccw(c11.247,-2.287) L2.1@11.356,-1.785 ; L2.1@11.53,-2.296 cw(c11.84,-2.661) 12.178,-2.323 ccw(c11.84,-2.661) L2.1@11.53,-2.296 ; 12.056,-3.721 cw(c11.718,-4.059) 12.196,-4.059 ccw(c11.718,-4.059) 12.056,-3.721
NetD3_1: D3.1 D7.1 K1.2 | length 18.7
  Top Layer w0.15: D7.1@83.292,-5.561 ccw(c82.737,-5.007) 83.521,-5.007 ccw(c84.306,-5.007) D7.1@83.751,-5.561 ; D3.1@83.292,-4.446 cw(c82.737,-5.001) 83.521,-5.001 cw(c84.306,-5.001) D3.1@83.751,-4.446 ; D7.1@83.398,-5.667 ccw(c83.099,-5.369) 83.521,-5.369 ccw(c83.944,-5.369) D7.1@83.645,-5.667 ; D3.1@83.398,-4.34 cw(c83.099,-4.639) 83.521,-4.639 cw(c83.944,-4.639) D3.1@83.645,-4.34 ; D7.1@83.418,-5.862 ccw(c83.87,-5.552) D7.1@83.87,-6.1 ; D3.1@83.521,-4.216 D7.1@83.521,-5.791 83.83,-6.1 K1.2@84.725,-6.1 ; D7.1@83.542,-5.777 ccw(c84.155,-5.356) 84.155,-6.1 ; D7.1@83.666,-5.692 ccw(c84.44,-5.161) K1.2@84.44,-6.1 ; D7.1@83.789,-5.607 ccw(c84.725,-4.965) K1.2@84.725,-6.1 ; K1.2@84.331,-6.294 ccw(c83.861,-6.764) 83.861,-6.1 ccw(c83.861,-5.436) K1.2@84.331,-5.905 ; K1.2@88.275,-6.1 K1.2@84.725,-6.1 ; 85.589,-6.1 cw(c85.589,-5.436) 85.12,-5.905 ccw(c85.589,-5.436) 85.589,-6.1 ; 85.589,-6.1 ccw(c85.589,-6.764) 85.12,-6.294 cw(c85.589,-6.764) 85.589,-6.1 ; 87.411,-6.1 cw(c87.411,-6.764) 87.88,-6.294 ccw(c87.411,-6.764) 87.411,-6.1 ; 87.411,-6.1 ccw(c87.411,-5.436) 87.88,-5.905 cw(c87.411,-5.436) 87.411,-6.1
NetD3_2: D3.2 R9.1 | length 4.6
  Top Layer w0.2: R9.1@80.01,-4.166 81.071,-4.166 D3.2@81.121,-4.216 ; 80.458,-4.166 cw(c80.458,-3.794) 80.195,-4.057 ccw(c80.458,-3.794) 80.458,-4.166 ; 80.458,-4.166 ccw(c80.458,-4.537) 80.195,-4.274 cw(c80.458,-4.537) 80.458,-4.166 ; R9.1@80.274,-4.166 cw(c80.274,-5.063) 80.909,-4.429 ccw(c80.274,-5.063) R9.1@80.274,-4.166 ; 80.52,-4.166 ccw(c80.52,-3.615) 80.909,-4.004 cw(c80.52,-3.615) 80.52,-4.166
NetD4_1: D4.1 R23.1 | length 3.8
  Top Layer w0.3: R23.1@109.449,-7.696 D4.1@109.449,-5.756 ; D4.1@109.301,-5.904 cw(c108.943,-6.261) 109.449,-6.261 ccw(c108.943,-6.261) D4.1@109.301,-5.904 ; 109.449,-6.4 cw(c110.151,-6.4) 109.654,-5.904 ccw(c110.151,-6.4) 109.449,-6.4
NetD4_2: D4.2 Q3.3 | length 29.7
  Top Layer w0.2: Q3.3@93.777,-8.357 v1@95.326,-8.357 ; D4.2@109.471,-4.128 v1@109.471,-2.283 ; v1@95.326,-8.357 cw(c95.326,-7.672) 94.759,-8.055 ccw(c95.326,-7.672) v1@95.326,-8.357 ; 109.471,-3.404 cw(c108.746,-3.404) 109.258,-3.916 ccw(c108.746,-3.404) 109.471,-3.404 ; 109.471,-3.404 ccw(c110.195,-3.404) 109.683,-3.916 cw(c110.195,-3.404) 109.471,-3.404 ; Q3.3@94.593,-8.167 ccw(c94.95,-7.926) 94.95,-8.357 cw(c94.95,-7.926) Q3.3@94.593,-8.167 ; Q3.3@94.715,-8.508 cw(c95.08,-8.872) 95.08,-8.357 ccw(c95.08,-8.872) Q3.3@94.715,-8.508 ; Q3.3@94.877,-8.357 ccw(c94.877,-7.908) 95.195,-8.225 cw(c94.877,-7.908) Q3.3@94.877,-8.357 ; 95,-8.357 cw(c95,-8.632) 95.195,-8.437 ccw(c95,-8.632) 95,-8.357 ; v1@109.292,-2.316 cw(c108.86,-2.748) 109.471,-2.748 ccw(c108.86,-2.748) v1@109.292,-2.316
  Bottom Layer w0.2: v1(95.301,-8.331) 103.276,-8.331 v1(109.398,-2.21) ; 95.663,-8.331 cw(c95.663,-7.969) 95.407,-8.225 ccw(c95.663,-7.969) 95.663,-8.331 ; 95.663,-8.331 ccw(c95.663,-8.693) 95.407,-8.437 cw(c95.663,-8.693) 95.663,-8.331 ; 109.142,-2.466 cw(c109.398,-2.722) 109.398,-2.36 ccw(c109.398,-2.722) 109.142,-2.466 ; 109.142,-2.466 ccw(c108.886,-2.21) 109.248,-2.21 cw(c108.886,-2.21) 109.142,-2.466
NetD5_1: D5.1 R24.1 | length 3.9
  Top Layer w0.3: R24.1@106.477,-7.696 D5.1@106.477,-5.68 ; D5.1@106.303,-5.853 cw(c105.885,-6.272) 106.477,-6.272 ccw(c105.885,-6.272) D5.1@106.303,-5.853 ; 106.477,-6.288 cw(c107.092,-6.288) 106.657,-5.853 ccw(c107.092,-6.288) 106.477,-6.288
NetD5_2: D5.2 Q4.3 | length 23.2
  Top Layer w0.2: Q4.3@94.361,-5.004 v1(95.631,-5.004) ; D5.2@106.473,-4.077 106.502,-4.049 v1(106.502,-3.251) ; 95.269,-5.004 cw(c95.269,-5.366) 95.525,-5.11 ccw(c95.269,-5.366) 95.269,-5.004 ; 95.269,-5.004 ccw(c95.269,-4.642) 95.525,-4.898 cw(c95.269,-4.642) 95.269,-5.004 ; v1@95.401,-5.004 cw(c95.401,-4.141) 94.791,-4.751 ccw(c95.401,-4.141) v1@95.401,-5.004 ; v1@95.401,-5.004 ccw(c95.401,-5.866) 94.791,-5.256 cw(c95.401,-5.866) v1@95.401,-5.004 ; 106.502,-3.613 cw(c106.864,-3.613) 106.608,-3.357 ccw(c106.864,-3.613) 106.502,-3.613 ; 106.502,-3.613 ccw(c106.14,-3.613) 106.396,-3.357 cw(c106.14,-3.613) 106.502,-3.613 ; D5.2@106.261,-3.865 ccw(c105.68,-3.283) 106.502,-3.283 cw(c105.68,-3.283) D5.2@106.261,-3.865 ; v1@106.502,-3.423 ccw(c107.128,-3.423) 106.686,-3.865 cw(c107.128,-3.423) v1@106.502,-3.423
  Bottom Layer w0.2: v1(95.631,-5.004) 104.75,-5.004 v1(106.502,-3.251) ; 95.993,-5.004 cw(c95.993,-4.642) 95.737,-4.898 ccw(c95.993,-4.642) 95.993,-5.004 ; 95.993,-5.004 ccw(c95.993,-5.366) 95.737,-5.11 cw(c95.993,-5.366) 95.993,-5.004 ; 106.246,-3.507 cw(c106.502,-3.763) 106.502,-3.401 ccw(c106.502,-3.763) 106.246,-3.507 ; 106.246,-3.507 ccw(c105.99,-3.251) 106.352,-3.251 cw(c105.99,-3.251) 106.246,-3.507
NetD6_1: D6.1 R25.1 | length 5.5
  Top Layer w0.2: D6.1@112.424,-5.625 112.446,-5.647 R25.1@112.446,-7.696 ; 112.446,-7.248 cw(c112.074,-7.248) 112.337,-7.511 ccw(c112.074,-7.248) 112.446,-7.248 ; 112.446,-7.248 ccw(c112.818,-7.248) 112.555,-7.511 cw(c112.818,-7.248) 112.446,-7.248 ; D6.1@112.212,-5.838 cw(c111.647,-6.403) 112.446,-6.403 ccw(c111.647,-6.403) D6.1@112.212,-5.838 ; 112.446,-6.297 cw(c113.095,-6.297) 112.636,-5.838 ccw(c113.095,-6.297) 112.446,-6.297
NetD6_2: D6.2 Q5.3 | length 41.6
  Top Layer w0.2: Q5.3@84.15,-8.255 v1(85.293,-8.255) ; D6.2@112.417,-4.027 112.417,-2.975 v1(112.42,-2.972) ; 84.931,-8.255 cw(c84.931,-8.617) 85.187,-8.361 ccw(c84.931,-8.617) 84.931,-8.255 ; 84.931,-8.255 ccw(c84.931,-7.893) 85.187,-8.149 cw(c84.931,-7.893) 84.931,-8.255 ; v1@85.19,-8.255 cw(c85.19,-7.393) 84.581,-8.002 ccw(c85.19,-7.393) v1@85.19,-8.255 ; v1@85.19,-8.255 ccw(c85.19,-9.117) 84.581,-8.508 cw(c85.19,-9.117) v1@85.19,-8.255 ; 112.417,-3.302 cw(c111.693,-3.302) 112.205,-3.814 ccw(c111.693,-3.302) 112.417,-3.302 ; 112.417,-3.302 ccw(c113.141,-3.302) 112.629,-3.814 cw(c113.141,-3.302) 112.417,-3.302 ; v1@112.314,-3.078 cw(c112.067,-3.326) 112.417,-3.326 ccw(c112.067,-3.326) v1@112.314,-3.078 ; 112.417,-3.342 cw(c112.791,-3.342) 112.526,-3.078 ccw(c112.791,-3.342) 112.417,-3.342
  Bottom Layer w0.2: v1(85.293,-8.255) 86.284,-8.255 86.893,-8.865 104.75,-8.865 110.642,-2.972 v1(112.42,-2.972) ; 85.655,-8.255 cw(c85.655,-7.893) 85.399,-8.149 ccw(c85.655,-7.893) 85.655,-8.255 ; 85.655,-8.255 ccw(c85.655,-8.617) 85.399,-8.361 cw(c85.655,-8.617) 85.655,-8.255 ; 112.058,-2.972 cw(c112.058,-3.334) 112.314,-3.078 ccw(c112.058,-3.334) 112.058,-2.972 ; 112.058,-2.972 ccw(c112.058,-2.61) 112.314,-2.866 cw(c112.058,-2.61) 112.058,-2.972
NetD7_2: D7.2 R13.1 | length 10.4
  Top Layer w0.127: R13.1@76.962,-7.366 77.546,-7.366 79.121,-5.791 D7.2@81.121,-5.791 ; 77.498,-7.366 cw(c77.498,-6.906) 77.173,-7.231 ccw(c77.498,-6.906) 77.498,-7.366 ; 77.498,-7.366 ccw(c77.498,-7.826) 77.173,-7.501 cw(c77.498,-7.826) 77.498,-7.366 ; 80.309,-5.791 cw(c80.309,-6.604) 80.883,-6.029 ccw(c80.309,-6.604) 80.309,-5.791 ; 80.309,-5.791 ccw(c80.309,-4.979) 80.883,-5.553 cw(c80.309,-4.979) 80.309,-5.791 ; 80.616,-5.791 cw(c80.616,-6.297) 80.973,-5.939 ccw(c80.616,-6.297) 80.616,-5.791 ; 80.616,-5.791 ccw(c80.616,-5.285) 80.973,-5.643 cw(c80.616,-5.285) 80.616,-5.791
NetD8_1: D8.1 R19.1 | length 3.7
  Top Layer w0.3: R19.1@103.403,-7.696 D8.1@103.403,-5.857 ; D8.1@103.306,-5.955 cw(c103.072,-6.189) 103.403,-6.189 ccw(c103.072,-6.189) D8.1@103.306,-5.955 ; 103.403,-6.574 cw(c104.279,-6.574) 103.66,-5.955 ccw(c104.279,-6.574) 103.403,-6.574
NetD8_2: D8.2 Q6.3 | length 18.6
  Top Layer w0.2: Q6.3@94.285,-1.753 94.285,-1.194 ; v1(95.606,-0.914) 94.564,-0.914 94.285,-1.194 ; D8.2@103.476,-4.179 v1@103.476,-3.629 ; 94.285,-1.194 cw(c94.026,-1.194) 94.135,-1.428 ccw(c94.026,-1.194) 94.285,-1.194 ; 94.285,-1.194 ccw(c94.543,-1.194) 94.435,-1.428 cw(c94.543,-1.194) 94.285,-1.194 ; 95.243,-0.914 cw(c95.243,-1.277) 95.5,-1.02 ccw(c95.243,-1.277) 95.243,-0.914 ; 95.243,-0.914 ccw(c95.243,-0.552) 95.5,-0.808 cw(c95.243,-0.552) 95.243,-0.914 ; v1@103.476,-3.629 cw(c103.122,-3.629) 103.314,-3.927 ccw(c103.122,-3.629) v1@103.476,-3.629 ; v1@103.476,-3.629 ccw(c103.831,-3.629) 103.639,-3.927 cw(c103.831,-3.629) v1@103.476,-3.629 ; v1@103.374,-3.611 cw(c103.126,-3.859) 103.476,-3.859 ccw(c103.126,-3.859) v1@103.374,-3.611 ; D8.2@103.476,-3.876 cw(c103.85,-3.876) 103.586,-3.611 ccw(c103.85,-3.876) D8.2@103.476,-3.876
  Bottom Layer w0.2: v1(95.606,-0.914) 96.393,-0.914 98.349,-2.87 102.845,-2.87 v1(103.48,-3.505) ; 95.968,-0.914 cw(c95.968,-0.552) 95.712,-0.808 ccw(c95.968,-0.552) 95.968,-0.914 ; 95.968,-0.914 ccw(c95.968,-1.277) 95.712,-1.02 cw(c95.968,-1.277) 95.968,-0.914 ; 103.224,-3.249 cw(c102.967,-3.505) 103.33,-3.505 ccw(c102.967,-3.505) 103.224,-3.249 ; 103.224,-3.249 ccw(c103.48,-2.993) 103.48,-3.355 cw(c103.48,-2.993) 103.224,-3.249
NetD9_1: D9.1 R20.1 | length 4.6
  Top Layer w0.3: R20.1@100.686,-7.696 D9.1@100.686,-6.003 ; D9.1@100.309,-5.98 cw(c99.4,-6.889) 100.686,-6.889 ccw(c99.4,-6.889) D9.1@100.309,-5.98 ; D9.1@100.521,-5.768 cw(c100.124,-6.165) 100.686,-6.165 ccw(c100.124,-6.165) D9.1@100.521,-5.768
NetD9_2: D9.2 Q7.3 | length 35.1
  Top Layer w0.2: Q7.3@78.029,-1.829 v1(78.029,-0.635) ; D9.2@100.479,-4.204 100.482,-4.201 v1(100.482,-3.404) ; 78.029,-0.997 cw(c78.391,-0.997) 78.135,-0.741 ccw(c78.391,-0.997) 78.029,-0.997 ; 78.029,-0.997 ccw(c77.667,-0.997) 77.923,-0.741 cw(c77.667,-0.997) 78.029,-0.997 ; 78.029,-0.966 cw(c77.166,-0.966) 77.776,-1.576 ccw(c77.166,-0.966) 78.029,-0.966 ; 78.029,-0.966 ccw(c78.891,-0.966) 78.281,-1.576 cw(c78.891,-0.966) 78.029,-0.966 ; 100.482,-3.766 cw(c100.845,-3.766) 100.588,-3.51 ccw(c100.845,-3.766) 100.482,-3.766 ; 100.482,-3.766 ccw(c100.12,-3.766) 100.376,-3.51 cw(c100.12,-3.766) 100.482,-3.766 ; D9.2@100.267,-3.992 ccw(c99.746,-3.472) 100.482,-3.472 cw(c99.746,-3.472) D9.2@100.267,-3.992 ; v1@100.482,-3.488 ccw(c101.195,-3.488) 100.691,-3.992 cw(c101.195,-3.488) v1@100.482,-3.488
  Bottom Layer w0.2: v1(78.029,-0.635) 92.913,-0.635 95.682,-3.404 v1(100.482,-3.404) ; 78.391,-0.635 cw(c78.391,-0.273) 78.135,-0.529 ccw(c78.391,-0.273) 78.391,-0.635 ; 78.391,-0.635 ccw(c78.391,-0.997) 78.135,-0.741 cw(c78.391,-0.997) 78.391,-0.635 ; 100.12,-3.404 cw(c100.12,-3.766) 100.376,-3.51 ccw(c100.12,-3.766) 100.12,-3.404 ; 100.12,-3.404 ccw(c100.12,-3.041) 100.376,-3.298 cw(c100.12,-3.041) 100.12,-3.404
NetD10_1: D10.1 R21.1 | length 3.6
  Top Layer w0.3: R21.1@97.587,-7.696 D10.1@97.587,-5.952 ; D10.1@97.337,-6.056 cw(c96.735,-6.659) 97.587,-6.659 ccw(c96.735,-6.659) D10.1@97.337,-6.056 ; 97.587,-6.307 cw(c97.942,-6.307) 97.691,-6.056 ccw(c97.942,-6.307) 97.587,-6.307
NetD10_2: D10.2 Q8.3 | length 23.3
  Top Layer w0.2: Q8.3@83.972,-1.803 84.887,-1.803 ; v1(85.319,-1.372) 84.887,-1.803 ; v1(96.495,-4.267) 97.494,-4.267 D10.2@97.507,-4.281 ; 84.887,-1.803 cw(c84.887,-1.223) 84.431,-1.582 ccw(c84.887,-1.223) 84.887,-1.803 ; 84.887,-1.803 ccw(c84.887,-2.384) 84.431,-2.025 cw(c84.887,-2.384) 84.887,-1.803 ; 85.063,-1.628 cw(c85.319,-1.884) 85.319,-1.522 ccw(c85.319,-1.884) 85.063,-1.628 ; 85.063,-1.628 ccw(c84.806,-1.372) 85.169,-1.372 cw(c84.806,-1.372) 85.063,-1.628 ; 96.857,-4.267 cw(c96.857,-3.905) 96.601,-4.161 ccw(c96.857,-3.905) 96.857,-4.267 ; 96.857,-4.267 ccw(c96.857,-4.629) 96.601,-4.373 cw(c96.857,-4.629) 96.857,-4.267 ; 96.751,-4.267 cw(c96.751,-5.037) 97.295,-4.493 ccw(c96.751,-5.037) 96.751,-4.267 ; 96.815,-4.267 ccw(c96.815,-3.588) 97.295,-4.068 cw(c96.815,-3.588) 96.815,-4.267
  Bottom Layer w0.2: v1(85.319,-1.372) 93.04,-1.372 95.936,-4.267 v1(96.495,-4.267) ; v1@96.389,-4.373 ccw(c96.132,-4.629) 96.132,-4.267 ccw(c96.132,-3.905) v1@96.389,-4.161 ; 85.681,-1.372 cw(c85.681,-1.009) 85.425,-1.266 ccw(c85.681,-1.009) 85.681,-1.372 ; 85.681,-1.372 ccw(c85.681,-1.734) 85.425,-1.478 cw(c85.681,-1.734) 85.681,-1.372